# Altium PCB XiaoZhi.pcbdoc (part 2 of 3)
Units mm, origin at the board's own origin, x right, y up, seen from the top; angles counter-clockwise.
Board outline 82.34 x 112.32 mm, 2 copper layers (Top Layer, Bottom Layer); 165 components, 129 nets, 592 pads, 327 vias.
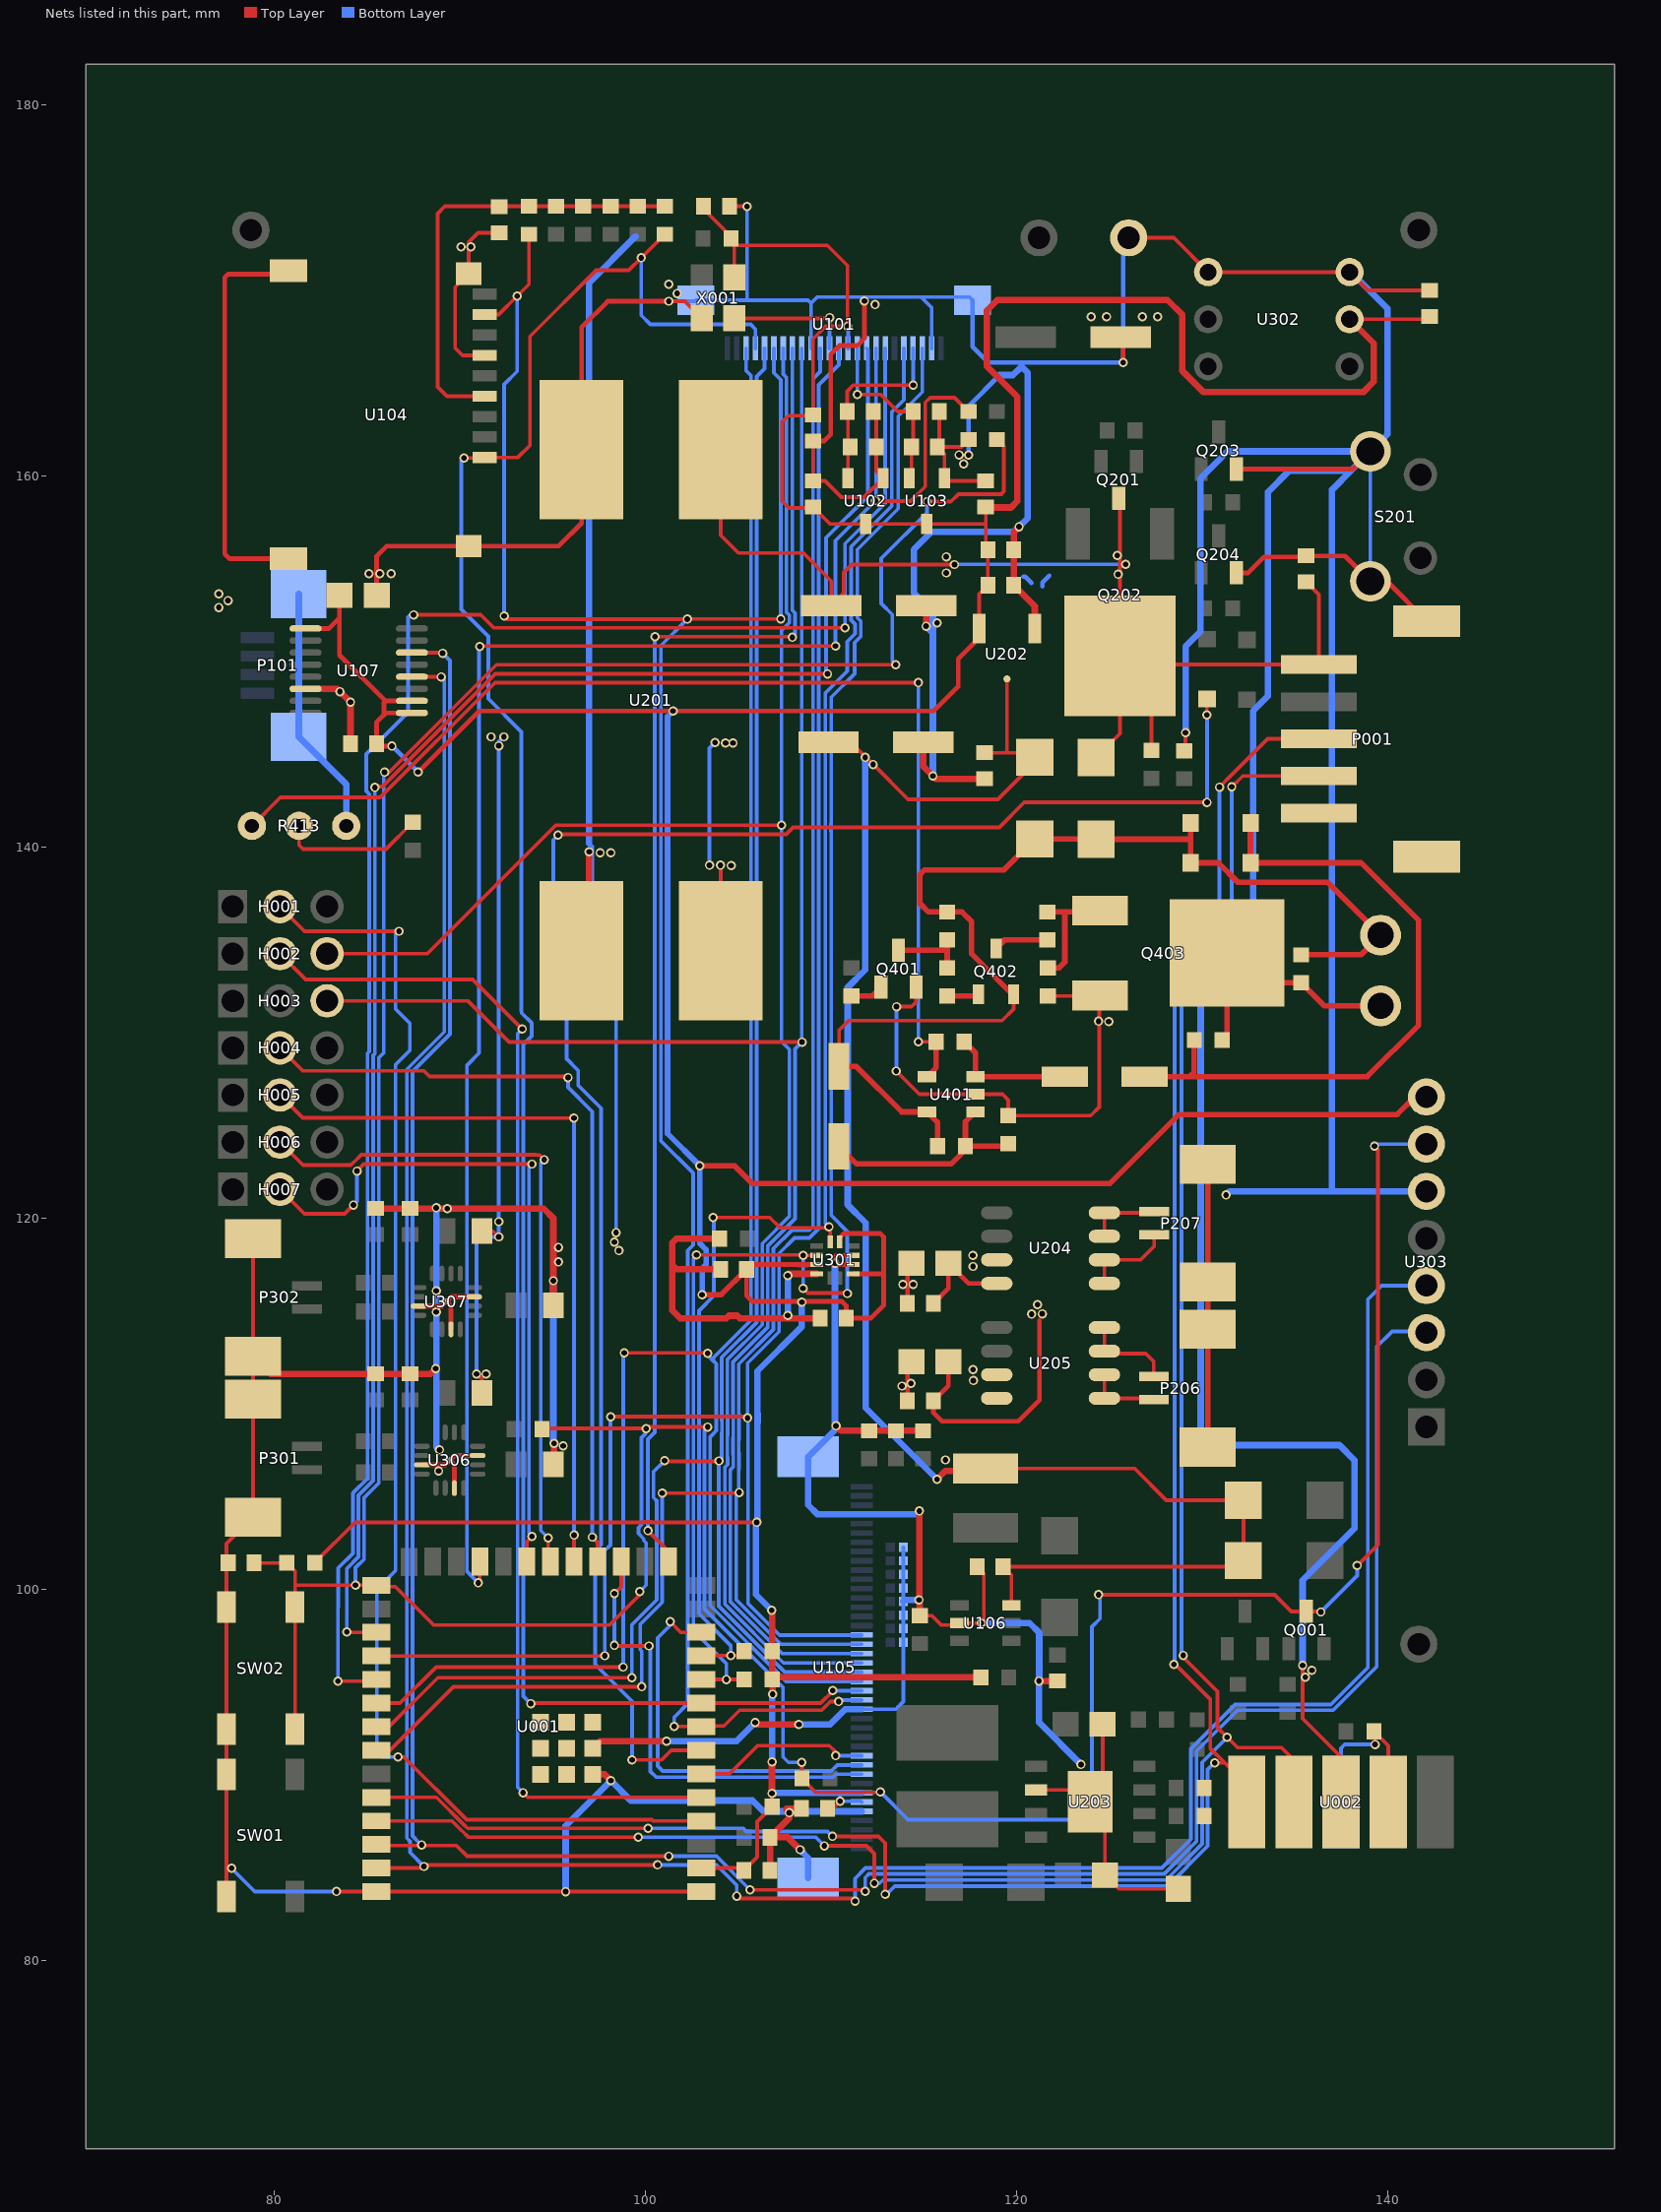
[diagram p2: the nets of this part, all layers, seen from the top]

## Via types
v1: diameter 0.5, hole 0.305, Top Layer to Bottom Layer, 327 vias

## Nets (pads, with @x,y where several pads share a name; then routed paths per layer and width w, separated by ;. In a path a pad name is that pad's centre, name@x,y a point inside that pad or via, vN(x,y) a via of type N, cw(c..) or ccw(c..) an arc to the next point about the centre after c; other vN are vias at no path point) (continued)
$4N7774: P207.2 U204.7 U204.8 | length 4
  Top Layer w0.2: U204.7@124.721,119.015 U204.8@124.721,120.285 127.34,120.285 P207.2@127.4,120.345
$4N7778: P207.1 U204.5 U204.6 | length 4.9
  Top Layer w0.2: U204.5@124.721,116.475 U204.6@124.721,117.745 126.665,117.745 127.4,118.48 P207.1@127.4,119.095
$4N7783: P206.2 U205.7 U205.8 | length 5
  Top Layer w0.2: U205.8@124.721,114.095 U205.7@124.721,112.825 124.846,112.7 126.95,112.7 127.38,112.27 P206.2@127.38,111.455
$4N7788: P206.1 U205.5 U205.6 | length 4
  Top Layer w0.2: U205.6@124.721,111.555 U205.5@124.721,110.285 127.3,110.285 P206.1@127.38,110.205
$6N902: Q401.1 R401.2 | length 1.8
  Top Layer w0.3: R401.2@111.09,131.968 112.213,131.968 Q401.1@112.68,132.435
$6N903: Q401.3 R402.1 R403.1 | length 4.2
  Top Layer w0.3: Q401.3@113.63,134.435 116.181,134.435 116.25,134.366 ; R403.1@116.25,133.475 116.25,134.366 ; R402.1@116.25,134.987 116.25,134.366
$6N904: Q402.1 R403.2 | length 1.7
  Top Layer w0.3: R403.2@116.25,131.968 117.843,131.968 Q402.1@117.93,132.055
$6N905: Q402.3 R404.2 | length 3
  Top Layer w0.3: Q402.3@118.88,134.525 119.342,134.987 R404.2@121.65,134.987
$6N906: Q403.1 R404.1 R405.2 | length 6.6
  Top Layer w0.3: R404.1@121.65,136.493 122.608,136.493 ; R405.2@121.671,133.475 122.275,133.475 122.59,133.79 122.59,136.475 122.608,136.493 ; Q403.1@124.476,136.57 124.399,136.493 122.608,136.493
$6N908: L401.1 Q403.2 R406.1 R407.2 | length 14.3
  Top Layer w0.3: R407.2@131.063,129.59 131.324,129.851 Q403.2@131.324,134.28 132.927,132.677 R406.1@135.32,132.677 136.562,131.435 L401.1@139.6,131.435
$6N909: C401.1 D401.2 D402.1 R407.1 | length 36.1
  Top Layer w0.3: C401.1@126.88,127.62 129.31,127.62 ; R407.1@129.557,129.59 129.557,127.867 129.31,127.62 ; D401.2@132.59,141.28 D402.1@132.59,139.14 138.55,139.14 141.65,136.04 141.65,130.39 138.88,127.62 129.31,127.62
$6N910: C402.2 R408.2 R409.1 U401.1 | length 12.2
  Top Layer w0.3: C402.2@110.41,123.87 111.368,122.912 116.462,122.912 117.233,123.683 R408.2@117.233,123.88 ; U401.1@117.77,125.72 117.233,125.183 R408.2@117.233,123.88 ; R409.1@119.54,124.007 119.413,123.88 R408.2@117.233,123.88
$6N913: R410.1 R413.1 U401.4 | length 61.5
  Top Layer w0.2: R413.1@78.79,141.13 80.32,142.66 85.7,142.66 91.89,148.85 v1@114.698,148.85 ; v1(114.7,129.5) R410.1@115.657,129.5
  Top Layer w0.3: U401.4@115.17,127.62 115.657,128.107 R410.1@115.657,129.5
  Bottom Layer w0.2: v1(114.7,129.5) v1(114.7,148.85)
$6N914: C402.1 D401.1 D402.2 D403.1 D404.1 L401.2 Q402.2 R402.2 R406.2 R408.1 U401.5 | length 64.3
  Top Layer w0.2: C402.1@110.41,128.17 110.43,128.19 110.43,130.12 110.95,130.64 119.21,130.64 119.83,131.26 Q402.2@119.83,132.055
  Top Layer w0.3: C402.1@110.41,128.17 111.35,128.17 113.8,125.72 U401.5@115.17,125.72 115.727,125.163 R408.1@115.727,123.88 ; Q402.2@119.83,132.055 119.755,132.055 117.57,134.24 117.57,135.97 117.047,136.493 R402.2@116.25,136.493 115.237,136.493 114.78,136.95 114.78,138.51 115.031,138.761 119.31,138.761 D404.1@120.97,140.42 124.26,140.42 D403.1@124.27,140.41 129.266,140.41 129.37,140.514 ; D401.1@129.37,141.28 129.37,140.514 ; R406.2@135.32,134.183 138.538,134.183 L401.2@139.6,135.245 136.755,138.09 131.91,138.09 130.86,139.14 D402.2@129.37,139.14 129.37,140.514
$6N916: C401.2 R410.2 U401.3 | length 6.9
  Top Layer w0.3: R410.2@117.163,129.5 117.77,128.893 U401.3@117.77,127.62 C401.2@122.58,127.62
$6N919: R413.2 R414.1 | length 7.9
  Top Layer w0.2: R413.2@81.33,141.13 81.33,140.09 81.54,139.88 86.017,139.88 R414.1@87.46,141.323
+3V3: C001.2 C101.1 C102.2 C107.1 C108.1 C109.2 C110.1 C111.2 C114.1 C206.2 C207.2 C301.1 C302.2 C303.2 R001.1 R002.1 R003.1 R004.1 R005.1 R006.1 R007.1 R008.1 R009.2 R010.2 R101.2 R117.2 U001.2 U101.11 U102.3 U103.3 U104.4 U105.6 U105.7 U107.1 U107.9 U107.10 U202.3 U301.3 U301.7 U301.11 U302.2 U303.8 X001.4 | length 346.5
  Top Layer w0.2: R010.2@82.173,101.42 84.353,103.6 99.909,103.6 99.93,103.621 100.32,103.621 100.34,103.6 v1(105.99,103.6) ; U104.4@91.317,164.286 89.294,164.286 88.79,164.79 88.79,174.13 89.178,174.518 C109.2@92.139,174.518 ; C109.2@92.11,174.489 C109.2@92.139,174.518 ; R005.1@101.034,174.518 R006.1@99.579,174.518 R007.1@98.123,174.518 R008.1@96.627,174.518 R003.1@95.172,174.518 R004.1@93.716,174.518 C109.2@92.139,174.518 ; U001.2@102.993,84.97 105.168,84.97 C001.2@105.29,84.848 106.01,85.568 106.01,87.473 R009.2@106.814,88.277 106.808,88.283 v1(106.808,89) ; C101.1@103.13,174.52 103.13,174.36 104.775,172.715 R101.2@104.775,172.618 ; R101.2@104.603,172.79 R101.2@104.775,172.618 ; X001.4@104.775,170.68 R101.2@104.775,172.618 ; C114.1@109.805,88.182 110.089,88.182 v1(110.48,88.573) ; U202.3@117.97,151.762 117.97,153.633 C207.2@118.44,154.104 C206.2@118.44,156.009 118.328,156.121 118.328,157.337 ; C107.1@118.328,158.316 118.328,157.337 ; U302.2@137.93,168.43 C303.2@142.1,168.43 ; R101.2@104.775,172.618 104.983,172.41 109.79,172.41 110.88,171.32 v1(110.88,168.05) 109.7,168.05 109.021,167.371 C108.1@109.021,163.272 108.979,163.23 107.69,163.23 107.36,162.9 107.36,158.62 107.72,158.26 108.965,158.26 C102.2@109.021,158.316 109.937,157.4 U102.3@111.851,157.4 U103.3@115.153,157.4 118.265,157.4 118.328,157.337
  Top Layer w0.254: U107.1@81.68,151.766 82.946,151.766 83.51,152.33 ; C110.1@83.51,153.555 83.51,152.33 ; v1(86.33,145.43) 85.624,145.43 C111.2@85.5,145.554 85.5,146.7 85.9,147.1 ; U107.9@87.412,147.216 86.016,147.216 85.9,147.1 ; U107.10@87.412,147.866 85.976,147.866 ; v1(87.74,144.03) 91.03,147.32 v1(101.478,147.32) 115.52,147.32 116.84,148.64 116.84,150.12 117.97,151.25 U202.3@117.97,151.762 ; C301.1@105.439,117.233 105.439,115.811 105.75,115.5 108.423,115.5 110.58,115.5 110.81,115.27 C302.2@110.81,114.6 112.13,114.6 112.82,115.29 112.82,117.05 ; U301.11@110.45,118.716 110.45,118.93 110.69,119.17 112.64,119.17 112.82,118.99 112.82,117.05 ; U301.7@111.175,116.991 112.76,116.991 112.82,117.05 ; C303.2@142.1,168.43 C303.2@142.25,168.58 ; 83.51,152.33 83.51,150.332 85.976,147.866 ; 85.9,147.1 85.9,147.79 85.976,147.866
  Top Layer w0.28: C301.1@105.439,117.233 105.697,117.491 108.269,117.491 108.279,117.481 108.701,117.481 108.711,117.491 U301.3@109.225,117.491
  Top Layer w0.3: v1(102.92,122.812) 104.798,122.812 105.76,121.85 125.01,121.85 128.74,125.58 140.49,125.58 141.43,126.52 U303.8@142.072,126.52 ; v1(103.044,115.87) 104.076,115.87 C301.1@105.439,117.233
  Top Layer w0.35: v1(106.79,98.86) 106.814,98.836 R002.1@106.814,96.659 R001.1@106.814,95.135 ; v1(106.808,89) 106.808,90.688 v1(106.81,90.69) ; v1(106.84,94.34) 106.84,95.109 R001.1@106.814,95.135 ; v1(108.42,115.46) 108.42,115.497 v1@108.423,115.5 ; R117.2@118.061,95.247 106.926,95.247 R001.1@106.814,95.135 ; C107.1@118.328,158.316 118.355,158.289 119.689,158.289 120.03,158.63 120.03,164.25 118.38,165.9 118.38,168.9 118.95,169.47 128.12,169.47 128.919,168.671 128.919,165.641 130.06,164.5 138.66,164.5 139.23,165.07 139.23,167.13 U302.2@137.93,168.43
  Bottom Layer w0.2: v1@105.94,103.571 v1@105.961,103.571 ; 110.629,89.029 110.48,88.88 v1(110.48,88.573) 111.598,88.573 U105.6@111.643,88.528 ; v1(110.88,168.05) 110.912,168.018 U101.11@110.912,166.859
  Bottom Layer w0.254: v1(86.33,145.43) 86.34,145.43 v1(87.74,144.03)
  Bottom Layer w0.3: v1(101.478,147.32) 101.18,147.022 101.18,124.552 v1(102.92,122.812) 102.92,118.63 103.26,118.29 103.26,118.226 103.262,118.224 103.262,117.793 103.26,117.791 103.26,117.5 103.044,117.284 v1(103.044,115.87)
  Bottom Layer w0.35: v1(106.79,98.86) 105.94,99.71 105.94,103.571 106.027,103.658 106.027,108.987 106.037,108.997 106.037,109.448 106.027,109.458 106.027,111.757 108.42,114.15 v1(108.42,115.46) ; v1(106.808,89) 106.837,89.029 110.629,89.029 U105.7@111.643,89.029 ; v1(106.81,90.69) 106.81,94.31 v1(106.84,94.34)
+5V: C113.2 C204.1 C205.2 D203.1 D204.1 D404.2 L102.1 R302.1 R303.1 U106.6 U201.2 U202.2 | length 146.7
  Top Layer w0.2: v1(90.89,111.6) 91.18,111.31 R302.1@91.18,110.57 ; R303.1@91.18,119.29 91.78,119.29 v1(92.09,118.98) ; v1(104.04,139.01) 104.05,139 U201.2@104.05,134.4 ; C204.1@109.855,145.64 111.06,145.64 111.858,144.842 v1(112.263,144.437) 114.14,142.56 118.98,142.56 120.97,144.55 D404.2@120.97,144.82 120.72,145.07 119.385,145.07 ; C205.2@118.27,145.07 119.385,145.07 ; L102.1@118.307,106.499 126.351,106.499 128.058,104.792 D203.1@132.21,104.792 D204.1@132.21,101.536 131.89,101.216 C113.2@119.261,101.216 119.707,100.77 U106.6@119.707,99.118 ; U202.2@119.47,149.05 119.47,145.155 119.385,145.07
  Top Layer w0.35: v1(111.83,144.82) 111.852,144.842 v1@111.858,144.842 ; v1(115.7,105.92) 116.15,106.37 118.178,106.37 L102.1@118.307,106.499
  Bottom Layer w0.2: v1(90.89,111.6) 90.89,118.7 91.17,118.98 v1(92.09,118.98) v1(92.09,119.802) 92.09,145.66 v1(92.36,145.93) ; v1(103.441,139.01) 103.441,145.321 v1(103.74,145.62)
  Bottom Layer w0.35: v1(111.83,144.82) 111.83,133.37 110.89,132.43 110.89,120.71 111.86,119.74 111.86,109.76 v1(115.7,105.92)
  other v1: 116.15,106.966 91.4,111.6 104.607,138.99 92.09,145.446 104.31,145.6 104.712,145.6 91.68,145.93
+12V: C202.1 C203.2 C211.1 C212.1 C213.2 C214.2 D403.2 P001.5 Q201.3 Q202.2 R020.1 U201.1 U204.4 U205.4 | length 86.6
  Top Layer w0.2: U201.1@104.05,161.4 104.05,156.79 105.01,155.83 108.5,155.83 110.005,154.325 C202.1@110.005,152.99 110.68,153.665 110.68,154.79 111.1,155.21 v1(116.64,155.21) ; D403.2@124.27,144.81 125.563,146.102 Q202.2@125.563,150.284 ; Q201.3@125.492,158.778 125.563,158.707 125.563,155.214 ; v1(125.86,155.22) 125.855,155.214 125.563,155.214 ; R020.1@127.26,145.193 127.26,148.587 Q202.2@126.026,149.821 ; C203.2@135.59,154.28 136.279,153.591 P001.5@136.279,149.821 Q202.2@126.026,149.821 ; Q202.2@125.563,150.284 Q202.2@126.026,149.821 ; Q202.2@125.563,150.284 125.563,155.214
  Top Layer w0.254: C214.2@115.51,115.394 116.317,116.201 C212.1@116.317,117.567 117.409,116.475 U204.4@118.919,116.475 ; C211.1@116.317,112.247 116.317,110.967 C213.2@115.51,110.16 115.51,109.5 115.96,109.05 120.08,109.05 121.22,110.19 121.22,114.49
  Bottom Layer w0.2: v1(116.64,155.21) 116.65,155.22 v1(125.86,155.22)
  Bottom Layer w0.254: 120.36,154.56 120.45,154.56 120.79,154.22 ; 121.38,154.04 121.38,154.24 121.75,154.61
  other v1: 120.8,114.82 121.37,114.84 121.11,115.33 125.456,154.684 116.2,154.76 116.2,155.633 125.406,155.7
CAM_1V2: C105.1 C106.1 U101.10 U103.2 | length 9.5
  Top Layer w0.2: v1(111.412,164.377) 112.663,164.377 113.579,163.461 C105.1@114.417,163.461 114.417,161.647 C106.1@114.326,161.556 114.326,159.993 U103.2@114.203,159.87
  Bottom Layer w0.2: v1(111.412,164.377) U101.10@111.412,166.859
CAM_2V8: C103.1 C104.1 U101.4 U102.2 | length 10.4
  Top Layer w0.2: U102.2@110.901,159.87 110.901,163.421 C103.1@110.861,163.461 110.861,164.551 111.19,164.88 v1(114.42,164.88)
  Bottom Layer w0.2: U101.4@114.412,166.859 114.42,166.851 v1(114.42,164.88)
CAM_D0: R004.2 U001.8 U101.19 U104.8 U105.17 | length 125.2
  Top Layer w0.2: U104.8@91.317,168.686 92.081,168.686 v1(93.078,169.682) 93.716,170.321 R004.2@93.716,173.011 ; v1(92.38,152.44) 92.55,152.27 v1(102.25,152.27) 102.26,152.28 v1(107.282,152.28) ; v1(101.54,92.6) 102.923,92.6 U001.8@102.953,92.63 ; U001.8@102.993,92.59 U001.8@102.953,92.63 ; v1(110.405,93.945) 109.945,93.945 109.48,93.48 105.07,93.48 104.22,92.63 U001.8@102.953,92.63
  Bottom Layer w0.2: v1(92.38,152.44) 92.38,164.925 93.078,165.623 v1(93.078,169.682) ; v1(101.54,92.6) 101.54,93.1 102.27,93.83 102.27,113.144 102.272,113.146 102.272,118.252 102.56,118.54 102.56,122.42 100.828,124.152 100.828,150.848 v1(102.25,152.27) ; U101.19@106.912,166.859 106.912,165.542 107.282,165.172 v1(107.282,152.28) ; v1(110.405,93.945) 110.487,94.027 U105.17@111.643,94.027
CAM_D1: R005.2 U001.9 U101.21 U104.1 U105.18 | length 117.1
  Top Layer w0.2: v1(90.22,160.95) 91.281,160.95 U104.1@91.317,160.986 93.126,160.986 93.772,161.632 93.772,167.505 97.337,171.07 99.093,171.07 v1(99.761,171.738) R005.2@101.034,173.011 ; v1(93.812,93.83) 93.842,93.86 U001.9@102.993,93.86 109.433,93.86 110.079,94.506 v1(110.079,94.542)
  Bottom Layer w0.2: v1(90.22,160.95) 90.07,160.8 90.07,152.8 91.53,151.34 91.53,147.98 93.31,146.2 93.31,131.15 93.318,131.142 93.318,131.049 93.856,130.511 93.856,129.799 93.412,129.355 93.412,94.23 v1(93.812,93.83) ; v1(99.761,171.738) 99.761,168.649 100.262,168.148 105.67,168.148 105.912,167.906 U101.21@105.912,166.859 ; v1(110.079,94.542) 110.092,94.528 U105.18@111.643,94.528
CAM_D2: U001.32 U101.22 U105.19 | length 114.9
  Top Layer w0.2: U001.32@85.493,93.86 86.77,93.86 88.71,95.8 v1(98.79,95.8) ; v1(98.85,112.73) 103.326,112.73 v1(103.346,112.71)
  Bottom Layer w0.2: v1(98.79,95.8) 98.79,112.67 v1(98.85,112.73) ; v1(103.346,112.71) 103.346,112.608 103.65,112.304 ; U101.22@105.412,166.859 105.412,165.659 105.68,165.391 105.68,114.496 103.65,112.466 103.65,112.304 ; U105.19@111.643,95.028 107.577,95.028 103.478,99.127 103.478,108.219 103.529,108.27 103.539,108.27 103.814,108.545 103.814,108.935 103.804,108.945 103.804,112.15 103.65,112.304
CAM_D3: U001.33 U101.20 U105.20 | length 108.3
  Top Layer w0.2: U001.33@85.493,92.59 86.17,92.59 88.81,95.23 v1(99.26,95.23) ; v1(101.024,106.92) 101.064,106.88 103.918,106.88 v1(103.948,106.91)
  Bottom Layer w0.2: v1(99.26,95.23) 99.26,98.08 100.595,99.415 100.595,104.767 100.427,104.935 100.427,106.323 v1(101.024,106.92) ; U101.20@106.412,166.859 106.412,165.767 105.982,165.338 105.982,114.37 104.106,112.494 104.106,109.07 104.116,109.06 104.116,108.42 104.106,108.41 104.106,107.068 v1(103.948,106.91) 103.948,99.084 107.503,95.529 U105.20@111.643,95.529
CAM_D4: H002.3 U101.18 U105.21 | length 105.7
  Top Layer w0.2: H002.3@82.838,134.243 88.234,134.243 95.161,141.17 v1(107.322,141.17)
  Bottom Layer w0.2: U101.18@107.412,166.859 107.412,165.469 107.584,165.297 107.584,152.643 107.752,152.475 107.752,152.085 107.322,151.655 v1(107.322,141.17) 107.322,129.508 107.752,129.078 107.752,120.089 106.284,118.621 106.284,114.245 104.408,112.369 104.408,109.195 104.418,109.185 104.418,108.295 104.408,108.285 104.408,107.115 104.418,107.105 104.418,106.715 104.268,106.565 104.268,99.191 107.43,96.029 U105.21@111.643,96.029
CAM_D5: H003.3 U101.16 U105.22 | length 103.9
  Top Layer w0.2: H003.3@82.84,131.704 90.42,131.704 92.644,129.48 v1(108.43,129.48)
  Bottom Layer w0.2: U101.16@108.412,166.859 108.412,129.49 108.421,129.49 v1(108.43,129.48) 108.054,129.104 108.054,119.964 106.586,118.496 106.586,114.12 104.71,112.244 104.71,109.32 104.72,109.31 104.72,108.17 104.71,108.16 104.71,107.24 104.72,107.23 104.72,106.59 104.57,106.44 104.57,99.316 107.357,96.529 U105.22@111.643,96.529
CAM_D6: U001.34 U101.14 U105.23 | length 108.6
  Top Layer w0.2: U001.34@85.493,91.32 86.23,91.32 89.65,94.74 v1(99.79,94.74) ; v1(100.897,105.17) 105,105.17 v1(105.04,105.21)
  Bottom Layer w0.2: v1(99.79,94.74) 99.79,96.665 99.71,96.745 99.71,98.103 100.856,99.249 100.856,99.265 100.897,99.306 v1(100.897,105.17) ; U101.14@109.412,166.859 109.412,165.612 109.018,165.218 109.018,119.555 108.795,119.332 107.862,119.332 106.888,118.358 106.888,113.995 105.012,112.119 105.012,109.445 105.022,109.435 105.022,108.045 105.012,108.035 105.012,107.365 105.022,107.355 105.022,106.465 105.012,106.455 105.012,105.238 105.103,105.148 104.968,105.148 104.88,105.06 104.88,99.433 107.286,97.027 U105.23@111.643,97.027
CAM_D7: U001.30 U101.12 U105.24 | length 109.7
  Top Layer w0.2: U001.30@85.493,96.4 97.79,96.4 v1(97.8,96.41) ; v1(98.12,109.292) 105.422,109.292 v1(105.492,109.223)
  Bottom Layer w0.2: v1(97.8,96.41) 97.8,102.07 98.1,102.37 98.1,109.272 v1(98.12,109.292) ; U101.12@110.412,166.859 110.412,165.982 109.32,164.89 109.32,119.43 108.82,118.93 108.03,118.93 107.19,118.09 107.19,113.87 105.492,112.172 v1(105.492,109.223) 105.52,109.195 105.52,99.22 107.213,97.527 U105.24@111.643,97.527
CAM_HREF: U001.29 U101.9 | length 93.2
  Top Layer w0.2: v1(83.9,97.7) 83.93,97.67 U001.29@85.493,97.67 ; v1(85.418,143.2) 85.468,143.25 85.83,143.25 91.9,149.32 v1(109.802,149.32)
  Bottom Layer w0.2: v1(83.9,97.7) 83.9,101.107 84.532,101.739 84.532,105.055 85.324,105.847 85.324,128.761 85.418,128.855 v1(85.418,143.2) ; v1(109.802,149.32) 109.72,149.402 109.72,156.653 111.972,158.905 111.972,166.799 U101.9@111.912,166.859
CAM_PCLK: U001.15 U101.17 | length 73.6
  Top Layer w0.2: v1(100.125,103.151) 101.228,102.048 U001.15@101.228,101.49 ; v1(100.5,151.33) 107.87,151.33 v1(107.91,151.29)
  Bottom Layer w0.2: v1(100.125,103.151) 100.125,108.08 100.5,108.455 v1(100.5,151.33) ; v1(107.91,151.29) 108.054,151.434 108.054,152.6 107.91,152.744 107.91,166.857 U101.17@107.912,166.859
CAM_PWDN: R102.1 U001.23 U101.8 | length 98.6
  Top Layer w0.2: v1(90.98,100.34) 91.068,100.428 U001.23@91.068,101.49 ; v1(91.06,150.8) 91.08,150.82 v1(110.23,150.82) ; v1(112.392,158.66) 112.412,158.64 114.29,158.64 115.069,159.419 115.069,163.949 115.33,164.21 116.645,164.21 R102.1@117.403,163.452
  Bottom Layer w0.2: v1(90.98,100.34) 90.38,100.94 90.38,128.24 91.03,128.89 91.03,150.77 v1(91.06,150.8) ; v1(110.23,150.82) 110.23,156.5 112.412,158.682 U101.8@112.412,166.859
CAM_RESET: C003.1 Q001.3 R010.1 R115.1 R116.1 R306.1 SW02.1 SW02.2 U001.27 U303.7 | length 233.3
  Top Layer w0.2: C003.1@78.91,101.41 80.657,101.41 R010.1@80.667,101.42 81.113,100.974 81.113,100.183 ; SW02.2@81.113,92.445 SW02.1@81.113,99.045 81.113,100.183 ; v1(85.938,144.022) 86.057,143.904 91.963,149.81 v1(113.481,149.81) ; R306.1@94.413,108.63 94.443,108.66 v1@100.04,108.66 ; v1(99.683,99.867) 99.683,99.7 98.053,98.07 88.577,98.07 86.508,100.14 85.563,100.14 U001.27@85.493,100.21 v1(84.37,100.21) 81.14,100.21 81.113,100.183 ; v1(100.03,108.65) v1@100.04,108.66 ; v1(103.344,108.74) 100.12,108.74 v1@100.04,108.66 ; v1(108.41,90.67) 108.423,90.657 R115.1@108.423,89.801 109.173,89.05 112.614,89.05 v1(112.644,89.08) ; v1(115.16,158.6) 116.45,158.6 116.86,159.01 119.16,159.01 119.3,159.15 119.3,161.573 R116.1@118.927,161.946 ; v1(124.41,99.7) 133.89,99.7 134.79,98.8 134.792,98.802 Q001.3@135.6,98.802 136.348,98.802 v1(136.38,98.77) ; v1(138.34,101.27) 139.46,102.39 139.46,123.69 v1(139.27,123.88)
  Bottom Layer w0.2: v1(84.37,100.21) 84.37,101.15 84.834,101.614 84.834,104.93 85.626,105.722 85.626,128.636 85.888,128.898 85.888,143.973 v1(85.938,144.022) ; v1(99.683,99.867) 100.03,100.215 100.03,102.499 99.898,102.631 99.898,102.713 99.614,102.997 99.614,103.305 99.782,103.473 99.782,108.165 99.988,108.371 99.988,108.608 v1(100.03,108.65) ; v1(103.344,108.74) 103.176,108.572 103.176,98.934 107.4,94.71 107.4,90.96 107.69,90.67 v1(108.41,90.67) ; v1(112.644,89.08) 114.144,87.58 123.45,87.58 124.05,88.18 124.05,97.98 124.48,98.41 124.48,99.63 v1(124.41,99.7) ; v1(113.481,149.81) 113.29,150.001 113.29,152.52 112.7,153.11 112.7,155.54 115.16,158 v1(115.16,158.6) ; v1(136.38,98.77) 138.34,100.73 v1(138.34,101.27) ; v1(139.27,123.88) 139.37,123.98 U303.7@142.072,123.98
CAM_SCL: R002.2 U001.11 U101.5 U301.12 | length 83.7
  Top Layer w0.2: U001.11@102.993,96.4 103.012,96.419 v1(104.586,96.419) 105.068,96.419 R002.2@105.308,96.659 ; v1(103.63,120.03) 106.69,120.03 107.25,119.47 109.93,119.47 109.95,119.45 U301.12@109.95,118.716
  Bottom Layer w0.2: v1(103.63,120.03) 103.682,119.978 103.682,115.812 102.876,115.006 102.876,112.896 102.874,112.894 102.874,98.676 104.586,96.965 v1(104.586,96.419) ; v1(109.88,119.52) 109.68,119.72 109.68,148.29 110.86,149.47 110.86,151.061 111.285,151.486 111.285,152.005 111.07,152.22 111.07,156.18 113.26,158.37 113.26,163.43 113.912,164.082 U101.5@113.912,166.859
CAM_SDA: R001.2 U001.10 U101.3 U301.2 | length 90.3
  Top Layer w0.2: v1(102.742,118.008) 108.472,118.008 v1(108.49,117.991) U301.2@109.225,117.991 ; U001.10@102.993,95.13 v1(104.349,95.13) 105.303,95.13 R001.2@105.308,95.135 ; v1(108.48,116.21) 108.74,115.95 110.85,115.95 v1(110.87,115.93)
  Bottom Layer w0.2: v1(102.742,118.008) 102.574,117.84 102.574,113.021 102.572,113.019 102.572,97.768 104.349,95.991 v1(104.349,95.13) ; v1(108.48,116.21) 108.49,116.22 v1(108.49,117.991) ; v1(110.87,115.93) 110.87,119.27 110,120.14 110,140.845 109.99,140.855 109.99,141.245 110,141.255 110,148.06 111.26,149.32 111.26,151.003 111.59,151.333 111.59,152.16 111.41,152.34 111.41,156.02 113.608,158.218 113.608,163.185 113.61,163.187 113.61,163.21 114.912,164.512 U101.3@114.912,166.859
CAM_VSYNC: U001.31 U101.7 | length 101
  Top Layer w0.2: v1(83.43,95.04) 85.403,95.04 U001.31@85.493,95.13 ; v1(87.5,152.5) 91.12,152.5 91.82,151.8 v1(110.74,151.8)
  Bottom Layer w0.2: v1(83.43,95.04) 83.43,99.03 83.44,99.04 83.44,101.14 84.23,101.93 84.23,105.18 85.022,105.972 85.022,128.886 85.116,128.98 85.116,142.837 84.948,143.005 84.948,145.008 87.2,147.26 87.2,152.38 87.32,152.5 v1(87.5,152.5) ; v1(110.74,151.8) 110.74,156.34 112.912,158.512 U101.7@112.912,166.859
CAM_XCLK: U101.13 X001.3 | length 6.8
  Top Layer w0.2: X001.3@104.775,168.48 109.872,168.48 v1(109.912,168.52)
  Bottom Layer w0.2: U101.13@109.912,166.859 v1(109.912,168.52)
CH343_3V3: R013.1 U002.2 U002.8 | length 9.6
  Top Layer w0.2: R013.1@139.238,92.341 R013.1@139.36,92.219 ; v1(139.3,91.63) 139.3,92.159 R013.1@139.36,92.219 ; U002.2@140.009,88.531 140.009,91.57 R013.1@139.36,92.219
  Bottom Layer w0.2: U002.8@137.469,88.531 137.469,91.429 137.67,91.63 v1(139.3,91.63)
ESP32_RXD: P001.3 U001.36 U002.5 | length 118.7
  Top Layer w0.2: U001.36@85.493,88.78 88.727,88.78 90.229,87.278 90.233,87.278 90.401,87.11 v1(100.136,87.11) ; v1(110.07,86.68) 112.55,86.68 112.91,86.32 v1(112.91,83.56) ; v1(128.46,95.95) 128.466,95.95 128.502,95.986 130.42,94.069 130.42,91.43 131.21,90.64 ; v1(130.66,90.64) 131.21,90.64 ; v1(130.92,143.22) 131.11,143.41 131.11,143.425 131.385,143.7 131.4,143.7 133.52,145.82 P001.3@136.279,145.82 ; U002.5@132.389,88.531 132.389,89.461 131.21,90.64
  Bottom Layer w0.2: v1(100.136,87.11) 105.263,87.11 105.429,86.945 109.806,86.945 v1(110.07,86.68) ; v1(112.91,83.56) 112.983,83.56 113.423,84 128.131,84 130.286,86.155 130.286,90.276 130.65,90.64 v1(130.66,90.64) ; v1(128.46,95.95) 128.498,95.989 128.498,134.619 130.92,137.04 v1(130.92,143.22)
ESP32_TXD: P001.2 U001.37 U002.4 | length 118.7
  Top Layer w0.2: U001.37@85.493,87.51 89.57,87.51 90.104,86.976 90.108,86.976 90.444,86.64 v1(99.6,86.64) ; v1(109.634,86.164) 111.896,86.164 112.321,85.739 v1(112.321,84.151) ; v1(128.968,96.43) 128.968,96.332 130.81,94.491 130.81,92.54 v1(131.332,92.018) 131.89,91.46 134.26,91.46 134.929,90.791 U002.4@134.929,88.531 ; v1(131.58,143.23) 132.171,143.821 P001.2@136.279,143.821
  Bottom Layer w0.2: v1(99.6,86.64) 109.158,86.64 v1(109.634,86.164) ; v1(112.321,84.151) 112.604,84.151 112.783,84.33 128.034,84.33 129.984,86.28 129.984,90.669 v1(131.332,92.018) ; v1(128.968,96.43) 128.87,96.529 128.87,134.27 131.58,136.98 v1(131.58,143.23)
GND: C001.1 C002.2 C003.2 C101.2 C102.1 C103.2 C104.2 C105.2 C106.2 C107.2 C108.2 C109.1 C110.2 C111.1 C112.1 C113.1 C114.2 C201.2 C202.2 C203.1 C204.2 C205.1 C206.1 C207.1 C208.2 C209.2 C210.2 C211.2 C212.2 C213.1 C214.1 C301.2 C302.1 C303.1 C304.1 C305.1 C306.1 C307.1 P001.1 P001.6 P001.7 P101.5 P101.6 P202.1 P206.3 P206.4 P207.3 P207.4 P301.3 P301.4 P302.3 P302.4 Q203.2 Q204.2 Q401.2 Q403.3 R021.2 R102.2 R104.2 R105.2 R106.2 R107.2 R108.2 R109.2 R110.2 R111.2 R112.1 R113.1 R114.1 R118.1 R205.1 R206.1 R301.1 R304.1 R305.1 R405.1 R409.2 R413.3 S201.3 S201.4 SW01.3 SW01.4 SW02.3 SW02.4 U001.1 U001.40 U001.41 U002.3 U101.2 U101.15 U101.25 U101.26 U102.1 U103.1 U104.6 U104.10 U104.11 U104.12 U104.13 U105.5 U105.16 U105.37 U105.41 U105.42 U106.2 U107.6 U201.3 U201.4 U202.1 U203.2 U203.9 U204.3 U205.3 U301.4 U301.8 U301.9 U302.3 U302.4 U303.6 U306.3 U306.11 U306.15 U306.17 U307.3 U307.11 U307.15 U307.17 U401.2 X001.2 | length 796
  Top Layer w0.2: SW01.4@77.413,83.428 SW01.3@77.413,90.028 SW02.4@77.413,92.445 SW02.3@77.413,99.045 77.413,102.448 P301.4@78.85,103.885 P301.3@78.85,110.235 P302.4@78.85,112.545 P302.3@78.85,118.895 ; v1(83.35,83.71) 85.483,83.71 U001.40@85.493,83.7 v1(95.694,83.7) U001.1@102.993,83.7 ; U104.6@91.317,166.486 90.134,166.486 89.74,166.88 89.74,170.16 U104.10@90.466,170.886 90.466,172.576 90.979,173.088 C109.1@92.11,173.088 ; v1(101.25,169.4) 102.105,169.4 X001.2@103.025,168.48 ; C101.2@104.53,174.52 105.46,174.52 v1(105.47,174.51) ; C108.2@109.021,161.872 C102.1@109.021,159.716 109.674,159.716 110.55,158.84 111.771,158.84 U102.1@112.801,159.87 112.424,160.247 C104.2@112.424,161.556 112.424,163.298 C103.2@112.261,163.461 ; v1(113.5,127.92) 114.75,126.67 U401.2@117.77,126.67 119.23,126.67 119.54,126.36 R409.2@119.54,125.513 123.983,125.513 124.45,125.98 124.45,131.964 Q403.3@124.454,131.968 ; v1(113.52,131.39) 114.33,131.39 114.58,131.64 Q401.2@114.58,132.435 ; R118.1@114.78,98.573 115.427,98.573 115.93,98.07 116.809,98.07 U106.2@116.906,98.168 v1(118.098,98.168) 118.23,98.3 118.23,100.846 C113.1@117.86,101.216 ; C105.2@115.817,163.461 115.817,161.647 C106.2@115.726,161.556 ; R102.2@117.403,161.946 117.013,161.556 C106.2@115.726,161.556 ; C107.2@118.328,159.716 116.257,159.716 U103.1@116.103,159.87 116.103,161.179 C106.2@115.726,161.556 ; U203.2@121.045,89.176 123.319,89.176 U203.9@123.954,88.541 ; R405.1@121.671,131.968 Q403.3@124.454,131.968 ; Q403.3@124.476,131.99 Q403.3@124.454,131.968 ; C208.2@124.626,92.722 124.626,89.214 U203.9@123.954,88.541 ; P202.1@126.03,172.82 128.46,172.82 U302.4@130.31,170.97 U302.3@137.93,170.97 138.92,169.98 C303.1@142.25,169.98 ; C210.2@128.706,83.848 125.499,83.848 C209.2@124.753,84.594 124.753,87.742 U203.9@123.954,88.541 ; R021.2@129.02,145.173 129.09,145.243 v1(129.09,146.16) ; v1(135.4,95.89) 135.4,93.03 137.469,90.961 U002.3@137.469,88.531
  Top Layer w0.254: U104.12@80.765,155.527 77.593,155.527 77.331,155.79 77.331,170.68 77.51,170.86 80.578,170.86 U104.11@80.765,171.047 ; C110.2@85.51,153.555 85.51,155.67 86.046,156.206 U104.13@90.466,156.206 95.316,156.206 96.55,157.44 U201.3@96.55,161.4 96.55,168 97.95,169.4 v1(101.25,169.4) ; C108.2@109.021,161.872 109.632,161.872 109.98,162.22 109.98,166.55 110.44,167.01 111.4,167.01 111.79,167.4 v1(111.79,169.41) ; U301.8@111.175,117.491 110.269,117.491 v1(110.2,117.56) 110.2,117.91 110.281,117.991 U301.9@111.175,117.991 ; C213.1@114.11,110.16 114.11,112.04 C211.2@114.317,112.247 ; C214.1@114.11,115.394 114.11,117.36 C212.2@114.317,117.567 ; C201.2@125.595,167.47 125.73,167.335 v1(125.73,166.1) ; Q204.2@131.829,154.767 132.467,154.767 133.32,155.62 135.53,155.62 C203.1@135.59,155.68 137.679,155.68 S201.3@139.049,154.31 139.941,154.31 P001.6@142.081,152.17 ; Q203.2@131.829,160.355 138.094,160.355 S201.4@139.049,161.31
  Top Layer w0.28: U307.11@87.765,115.256 89.018,115.256 U307.17@89.266,115.504 ; U306.11@87.949,106.701 89.201,106.701 U306.17@89.45,106.95 ; U307.15@89.515,114.003 89.515,115.256 U307.17@89.266,115.504 ; U306.15@89.699,105.449 89.699,106.701 U306.17@89.45,106.95 ; U307.3@90.768,115.753 89.515,115.753 U307.17@89.266,115.504 ; U306.3@90.951,107.199 89.699,107.199 U306.17@89.45,106.95
  Top Layer w0.3: P206.3@130.28,107.655 130.3,107.675 P207.3@130.3,116.545 P207.4@130.3,122.895
  Top Layer w0.35: P302.4@78.85,112.545 79.795,111.6 C304.1@85.46,111.6 C305.1@87.3,111.6 88.41,111.6 v1(88.69,111.88) ; U107.6@81.68,148.516 83.384,148.516 v1(84.1,147.8) C111.1@84.1,145.554 ; C307.1@85.46,120.51 C306.1@87.3,120.51 v1@88.68,120.51 ; v1(88.72,120.55) v1@88.68,120.51 ; R304.1@95.03,106.72 95.07,106.76 v1(95.07,107.85) ; R305.1@95.03,115.29 v1(95.03,116.62) 95.03,119.99 94.51,120.51 v1(89.311,120.51) v1@88.68,120.51 ; U201.4@96.55,134.4 96.96,134.81 v1(96.96,139.73) ; U001.41@97.143,90.02 97.79,90.02 v1(98.13,89.68) ; U001.41@97.143,91.42 97.533,91.81 v1(101.13,91.81) ; R301.1@103.986,118.884 101.654,118.884 101.43,118.66 101.43,117.48 ; C301.2@104.039,117.233 101.678,117.233 101.43,117.48 ; v1(105.903,92.817) 106.01,92.71 v1(108.26,92.71) ; C001.1@106.69,84.848 106.705,84.863 C002.2@106.705,86.626 ; v1(107.66,114.75) v1@107.51,114.6 ; v1(107.66,116.9) 107.751,116.991 U301.4@109.225,116.991 ; v1(108.32,85.96) 107.654,86.626 C002.2@106.705,86.626 ; C114.2@108.405,88.182 107.581,88.182 107.581,88.109 v1(107.74,87.95) 107.74,87.661 C002.2@106.705,86.626 ; C302.1@109.41,114.6 v1@107.51,114.6 ; v1(110.26,108.8) 110.527,108.533 R114.1@112.04,108.533 R113.1@113.495,108.533 R112.1@114.95,108.533 ; v1(114.73,99.42) v1@114.75,99.4 ; v1(114.75,104.21) v1@114.75,99.4 ; R118.1@114.78,98.573 114.78,99.115 114.75,99.145 v1@114.75,99.4 ; C204.2@114.965,145.64 114.965,144.335 115.63,143.67 C205.1@118.27,143.67 ; v1(115.11,151.89) 115.115,151.895 C202.2@115.115,152.99 ; v1(120.12,157.25) 119.84,156.97 C206.1@119.84,156.009 C207.1@119.84,154.104 120.97,152.974 U202.1@120.97,151.762 ; v1(121.2,95.05) C112.1@122.2,95.05 ; 101.43,117.48 101.43,115.03 101.86,114.6 104.349,114.6 104.487,114.738 104.938,114.738 105.076,114.6 v1@107.51,114.6
  Bottom Layer w0.2: v1(77.69,84.96) 78.94,83.71 v1(83.35,83.71) ; 96.96,140.183 97.12,140.023 97.12,131.99 98.408,130.702 v1(98.408,119.214) ; v1(101.25,169.4) 102.653,169.4 U101.25@102.714,169.461 105.439,169.461 ; v1(105.47,174.51) 105.47,169.492 105.439,169.461 ; U101.15@108.912,166.859 108.912,169.292 ; U105.16@111.643,93.527 113.477,93.527 113.886,93.936 R111.2@113.886,97.147 R110.2@113.886,97.877 R109.2@113.886,98.607 R108.2@113.886,99.337 R107.2@113.886,100.066 R106.2@113.886,100.796 R105.2@113.886,101.526 R104.2@113.886,102.256 ; v1(113.5,127.92) 113.52,127.94 v1(113.52,131.39) ; U101.2@115.412,166.859 115.412,169.058 114.84,169.63 ; U101.26@117.614,169.461 117.445,169.63 114.84,169.63 ; S201.3@139.049,154.31 S201.4@139.049,161.31 ; 105.439,169.461 108.743,169.461 108.912,169.292 ; 108.912,169.292 109.25,169.63 114.84,169.63
  Bottom Layer w0.254: v1(117.403,161.116) 117.403,163.743 119.084,165.424 ; U101.26@117.614,169.461 117.614,166.946 118.46,166.1 v1(125.73,166.1) 125.73,172.52 P202.1@126.03,172.82
  Bottom Layer w0.35: P101.5@81.315,145.93 83.87,143.375 R413.3@83.87,141.13 ; P101.5@81.315,145.93 P101.6@81.315,153.63 ; v1(88.69,111.88) 88.716,111.88 v1@88.72,111.876 ; v1(88.72,120.55) v1(88.72,116.08) v1(88.72,114.94) v1@88.72,111.876 ; v1(88.9,107.5) 88.72,107.68 v1@88.72,111.876 ; v1(95.03,116.62) 95.03,107.89 v1(95.07,107.85) ; v1(95.694,83.7) 95.694,87.244 v1(98.13,89.68) 99.2,88.61 105.76,88.61 106.342,88.028 v1@107.818,88.028 ; 96.96,140.183 96.96,170.4 99.46,172.9 ; v1(101.13,91.81) 104.895,91.81 v1(105.903,92.817) ; v1(107.66,114.75) v1(107.66,116.9) ; v1(107.74,87.95) v1@107.818,88.028 ; v1(108.26,92.71) 109.94,92.71 110.757,93.527 U105.16@111.643,93.527 ; v1(108.32,85.96) 108.757,85.523 U105.41@108.757,84.431 ; v1(110.2,117.56) v1@110.2,108.8 ; v1(110.26,108.8) v1@110.2,108.8 ; U105.5@111.643,88.028 v1@107.818,88.028 ; R108.2@113.886,99.337 113.969,99.42 v1(114.73,99.42) ; v1(114.75,104.21) 114.567,104.027 U105.37@111.643,104.027 109.273,104.027 108.757,104.543 U105.42@108.757,107.131 110.2,108.574 v1@110.2,108.8 ; v1(115.11,151.89) 115.477,151.523 ; v1(115.477,143.823) 115.477,151.523 ; v1(118.098,98.168) 120.692,98.168 121.21,97.65 121.21,95.06 v1(121.2,95.05) 121.2,92.81 v1(123.46,90.55) ; 119.084,165.424 119.792,165.424 120.249,165.881 120.59,165.54 120.59,157.72 v1(120.12,157.25) 119.855,156.985 115.415,156.985 114.46,156.03 114.46,153.68 115.477,152.663 115.477,151.523 ; v1(129.09,146.16) 129.09,150.8 129.89,151.6 129.89,159.85 131.35,161.31 S201.4@139.049,161.31 ; v1(131.28,121.24) 131.48,121.44 136.987,121.44 ; v1(135.4,95.89) 135.4,100.48 138.2,103.28 138.2,106.94 137.38,107.76 130.71,107.76 129.91,108.56 129.91,133.61 132.73,136.43 132.73,147.33 133.53,148.13 133.53,159.11 134.69,160.27 138.009,160.27 ; U302.3@137.93,170.97 138.01,170.97 139.97,169.01 139.97,162.231 S201.4@139.049,161.31 ; U303.6@142.072,121.44 136.987,121.44 ; 136.987,121.44 136.987,159.248 138.009,160.27 ; 138.009,160.27 S201.4@139.049,161.31
  other v1: 135.54,95.26 135.9,95.63 88.85,106.37 95.56,107.72 113.815,110.945 114.3,111.09 117.66,111.24 117.64,111.83 113.86,116.42 114.418,116.42 117.64,117.39 95.31,117.63 117.63,117.98 98.561,118.24 95.31,118.419 98.32,118.7 124.95,130.59 124.41,130.6 97.55,139.68 98.129,139.68 83.535,148.365 115.71,152.07 77.01,152.899 77.5,153.27 77.01,153.63 85.1,154.72 85.686,154.72 86.295,154.72 117.14,160.63 116.89,161.12 124,168.57 124.837,168.57 126.762,168.57 127.588,168.57 112.36,169.22 101.7,169.82 101.25,170.32 90.05,172.33 90.592,172.33
GPIO1: U001.39 U107.12 U303.4 | length 153.7
  Top Layer w0.2: U001.39@85.493,84.97 87.972,84.97 v1(88.06,85.058) 88.142,85.14 v1(100.65,85.14) ; U107.12@87.412,149.166 88.982,149.166 v1(88.988,149.16) ; v1(104.91,83.46) 105.04,83.33 111.14,83.33 v1(111.29,83.18)
  Bottom Layer w0.2: v1(88.06,85.058) 87.306,85.812 87.306,86.407 87.136,86.577 87.136,128.01 89.156,130.03 89.156,148.992 v1(88.988,149.16) ; v1(100.65,85.14) 103.82,85.14 104.91,84.05 v1(104.91,83.46) ; v1(111.29,83.18) 111.29,84.41 111.85,84.97 127.82,84.97 129.38,86.53 129.38,91.397 131.765,93.782 136.925,93.782 138.91,95.767 138.91,115.61 139.66,116.36 U303.4@142.072,116.36
GPIO2: U001.38 U107.14 U303.3 | length 150.7
  Top Layer w0.2: U001.38@85.493,86.24 85.553,86.18 v1@87.97,86.18 ; U107.14@87.412,150.466 89.036,150.466 v1(89.068,150.435) ; v1(87.93,86.22) v1@87.97,86.18 ; v1(101.25,85.61) 90.38,85.61 89.81,86.18 v1@87.97,86.18 ; v1(105.63,83.8) 111.75,83.8 v1(111.83,83.72)
  Bottom Layer w0.2: v1(87.93,86.22) 87.78,86.37 87.77,86.37 87.438,86.702 87.438,127.885 89.458,129.905 89.458,150.044 v1(89.068,150.435) ; v1(101.25,85.61) 103.82,85.61 v1(105.63,83.8) ; v1(111.83,83.72) 111.83,84.463 112.03,84.663 127.94,84.663 129.682,86.405 129.682,91.272 131.89,93.48 137.05,93.48 139.39,95.82 139.39,113.06 140.22,113.89 142.002,113.89 U303.3@142.072,113.82
GPIO4: H001.2 U001.4 | length 71.3
  Top Layer w0.2: H001.2@80.295,136.781 81.626,135.45 v1(86.72,135.45) ; v1(86.666,90.96) 86.974,90.96 90.354,87.58 100.331,87.58 100.401,87.51 U001.4@102.993,87.51
  Bottom Layer w0.2: v1(86.666,90.96) 85.81,90.96 85.52,91.25 85.52,99.993 86.532,101.005 86.532,128.26 87.3,129.028 87.3,130.49 86.532,131.258 86.532,135.262 v1(86.72,135.45)
GPIO5: H002.2 U001.5 | length 65.8
  Top Layer w0.2: H002.2@80.298,134.243 81.684,132.857 90.68,132.857 v1(93.356,130.18) ; v1(93.404,89.03) 93.654,88.78 U001.5@102.993,88.78
  Bottom Layer w0.2: v1(93.356,130.18) 93.11,129.934 93.11,89.324 v1(93.404,89.03)
GPIO6: U001.6 U105.11 | length 9.6
  Top Layer w0.2: U001.6@102.993,90.05 104.51,90.05 106.03,91.57 109.9,91.57 110.241,91.229 v1(110.241,91.031)
  Bottom Layer w0.2: v1(110.241,91.031) 111.639,91.031 U105.11@111.643,91.028
GPIO7: D202.1 U001.7 | length 97.2
  Top Layer w0.2: v1(95.288,140.632) 95.326,140.67 107.57,140.67 107.95,141.05 119.054,141.05 120.404,142.4 127.93,142.4 127.936,142.394 v1(130.25,142.394) ; v1(99.27,90.8) 100.86,90.8 101.38,91.32 U001.7@102.993,91.32 ; v1(130.24,147.11) 130.24,147.966 D202.1@130.244,147.97
  Bottom Layer w0.2: v1(95.288,140.632) 95.03,140.374 95.03,131.83 95.744,131.116 95.744,128.576 96.37,127.95 96.37,127.15 97.6,125.92 97.6,102.39 97.29,102.08 97.29,95.94 99.27,93.96 v1(99.27,90.8) ; v1(130.24,147.11) 130.25,147.1 v1(130.25,142.394)
GPIO8: U001.12 U105.10 | length 21.2
  Top Layer w0.2: v1(101.326,98.248) 101.904,97.67 U001.12@102.993,97.67
  Bottom Layer w0.2: v1(101.326,98.248) 101.326,98.056 100.65,97.38 100.65,90.47 100.92,90.2 110.003,90.2 110.33,90.527 U105.10@111.643,90.527
GPIO9: U001.17 U105.9 | length 24.9
  Top Layer w0.2: v1(98.32,96.97) 98.35,96.94 v1(100.18,96.94) ; v1(98.32,99.76) 98.688,100.128 U001.17@98.688,101.49
  Bottom Layer w0.2: v1(98.32,96.97) v1(98.32,99.76) ; v1(100.18,96.94) 100.26,96.86 100.26,90.18 100.57,89.87 110.1,89.87 110.257,90.027 U105.9@111.643,90.027
GPIO10: H004.2 U001.18 | length 43
  Top Layer w0.2: H004.2@80.3,129.166 81.536,127.93 88.05,127.93 88.36,127.62 95.818,127.62 95.82,127.618 v1(95.82,127.57) ; v1(97.13,102.8) 97.418,102.512 U001.18@97.418,101.49
  Bottom Layer w0.2: v1(95.82,127.57) 95.82,127.043 97.13,125.733 v1(97.13,102.8)
GPIO11: H005.2 U001.19 | length 40.3
  Top Layer w0.2: H005.2@80.3,126.627 81.527,125.4 86.403,125.4 86.413,125.39 v1(96.14,125.39) ; U001.19@96.148,101.49 96.148,102.908 v1(96.15,102.91)
  Bottom Layer w0.2: v1(96.14,125.39) 96.15,125.38 v1(96.15,102.91)
GPIO12: H006.2 U001.20 | length 37
  Top Layer w0.2: H006.2@80.3,124.089 81.539,122.85 84.103,122.85 84.255,123.002 84.277,123.002 84.685,123.41 94.062,123.41 94.07,123.402 94.278,123.402 v1(94.54,123.14) ; v1(94.748,102.76) 94.748,101.62 U001.20@94.878,101.49
  Bottom Layer w0.2: v1(94.54,123.14) 94.352,122.952 94.352,103.156 v1(94.748,102.76)
GPIO13: H007.2 U001.21 | length 37.9
  Top Layer w0.2: H007.2@80.3,121.55 81.62,120.23 83.79,120.23 v1(84.26,120.7) ; v1(84.45,122.532) 84.823,122.905 v1(93.882,122.905) ; U001.21@93.608,101.49 93.608,102.566 v1(93.882,102.84)
  Bottom Layer w0.2: v1(84.26,120.7) 84.45,120.89 v1(84.45,122.532) ; v1(93.882,102.84) 93.714,103.008 93.714,122.737 v1(93.882,122.905)